# Altium PCB 激光昆虫_Main蓝牙版  - 双面板 板厚1.0mm.PcbDoc (part 1 of 2)
Units mil, origin at the board's own origin, x right, y up, seen from the top; angles counter-clockwise.
Board outline 2129 x 2216 mil, 3 copper layers (Top Layer, Mid-Layer 14, Bottom Layer); 82 components, 45 nets, 210 pads, 156 vias.
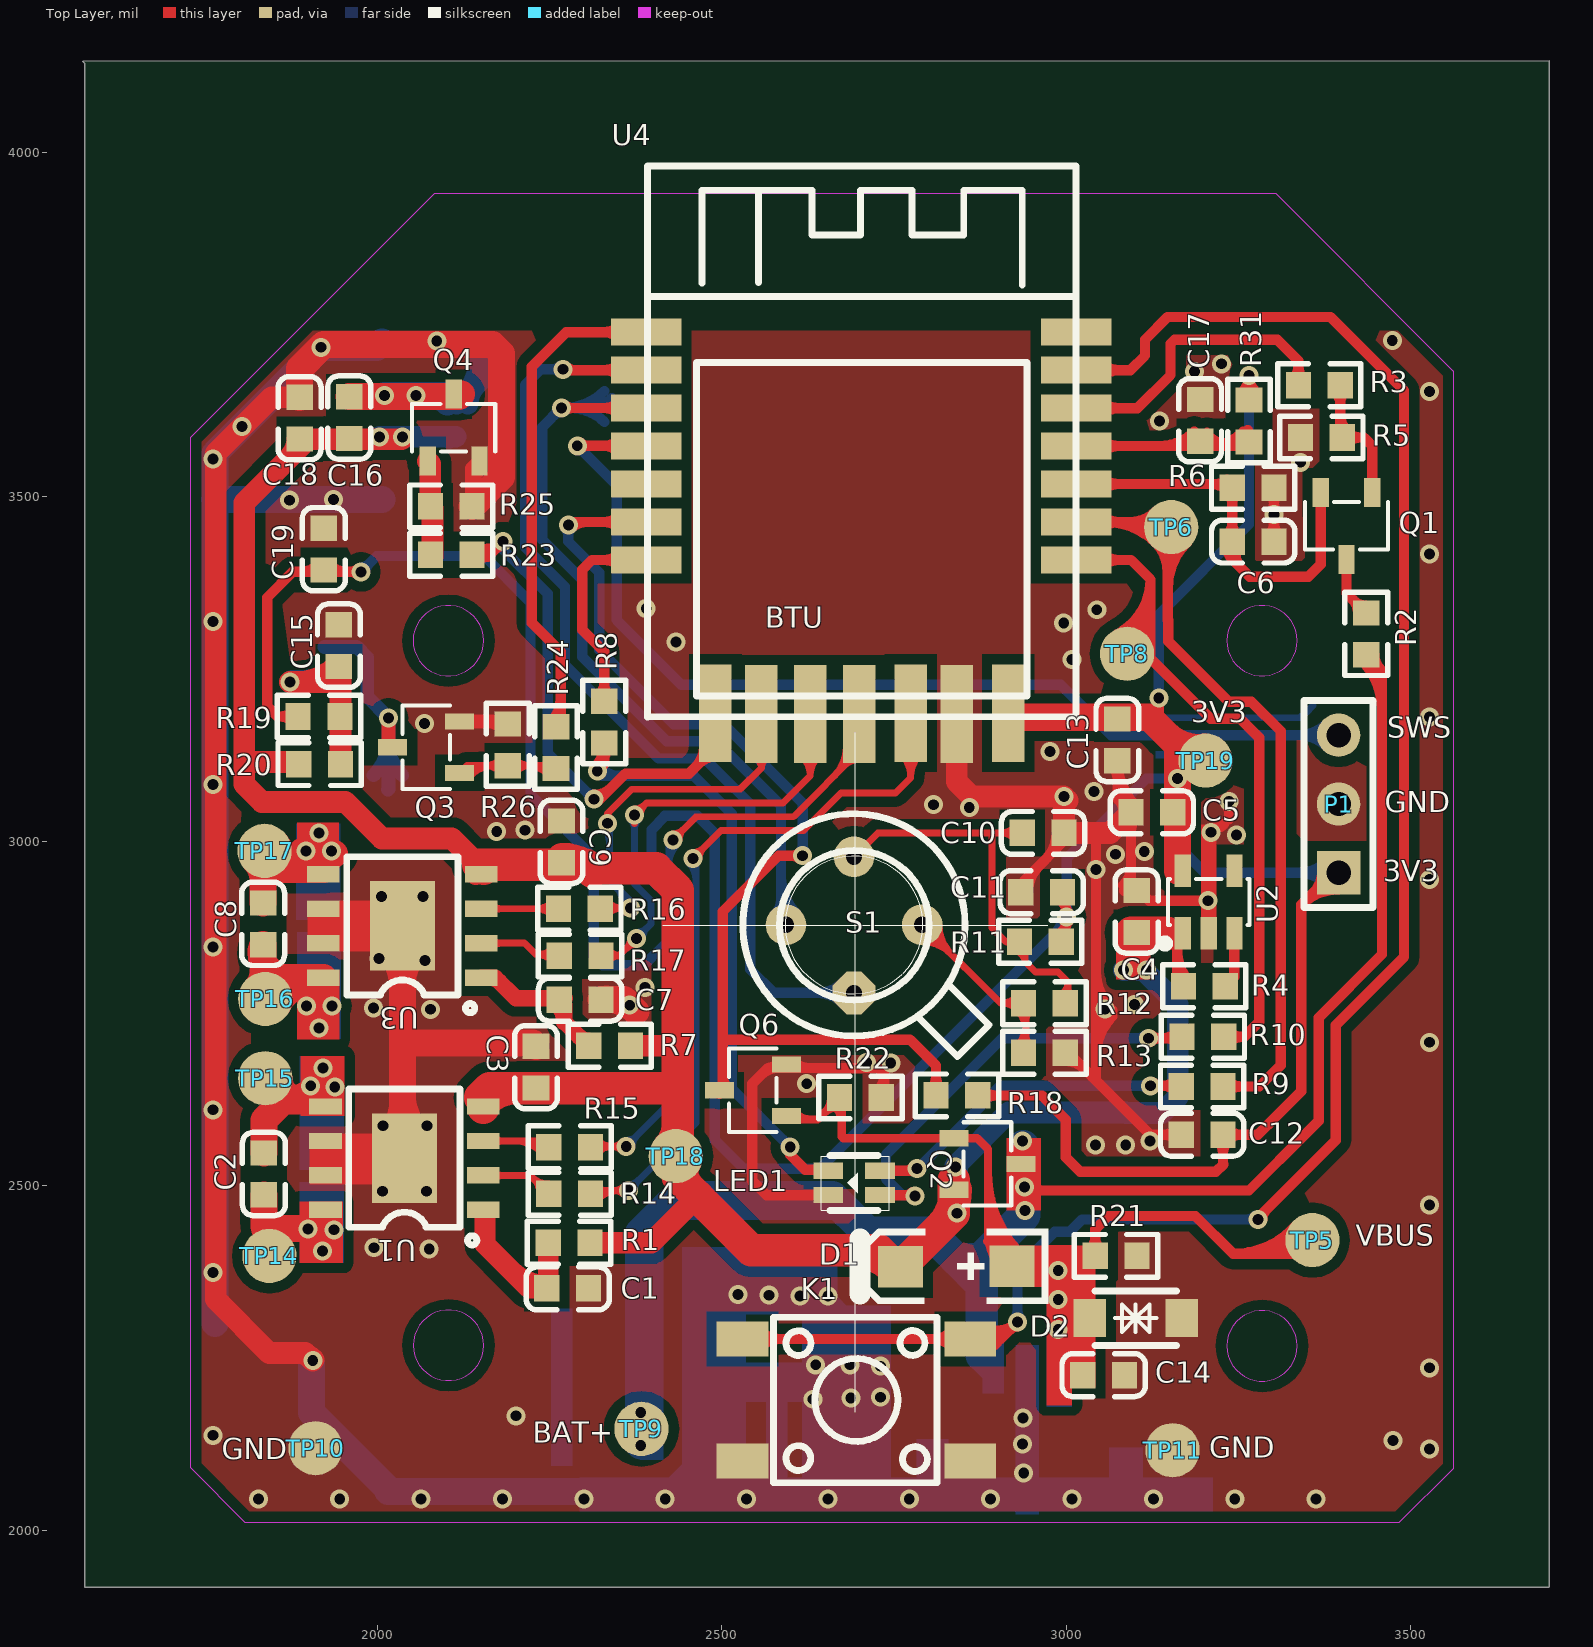
[diagram p0: Top Layer view]
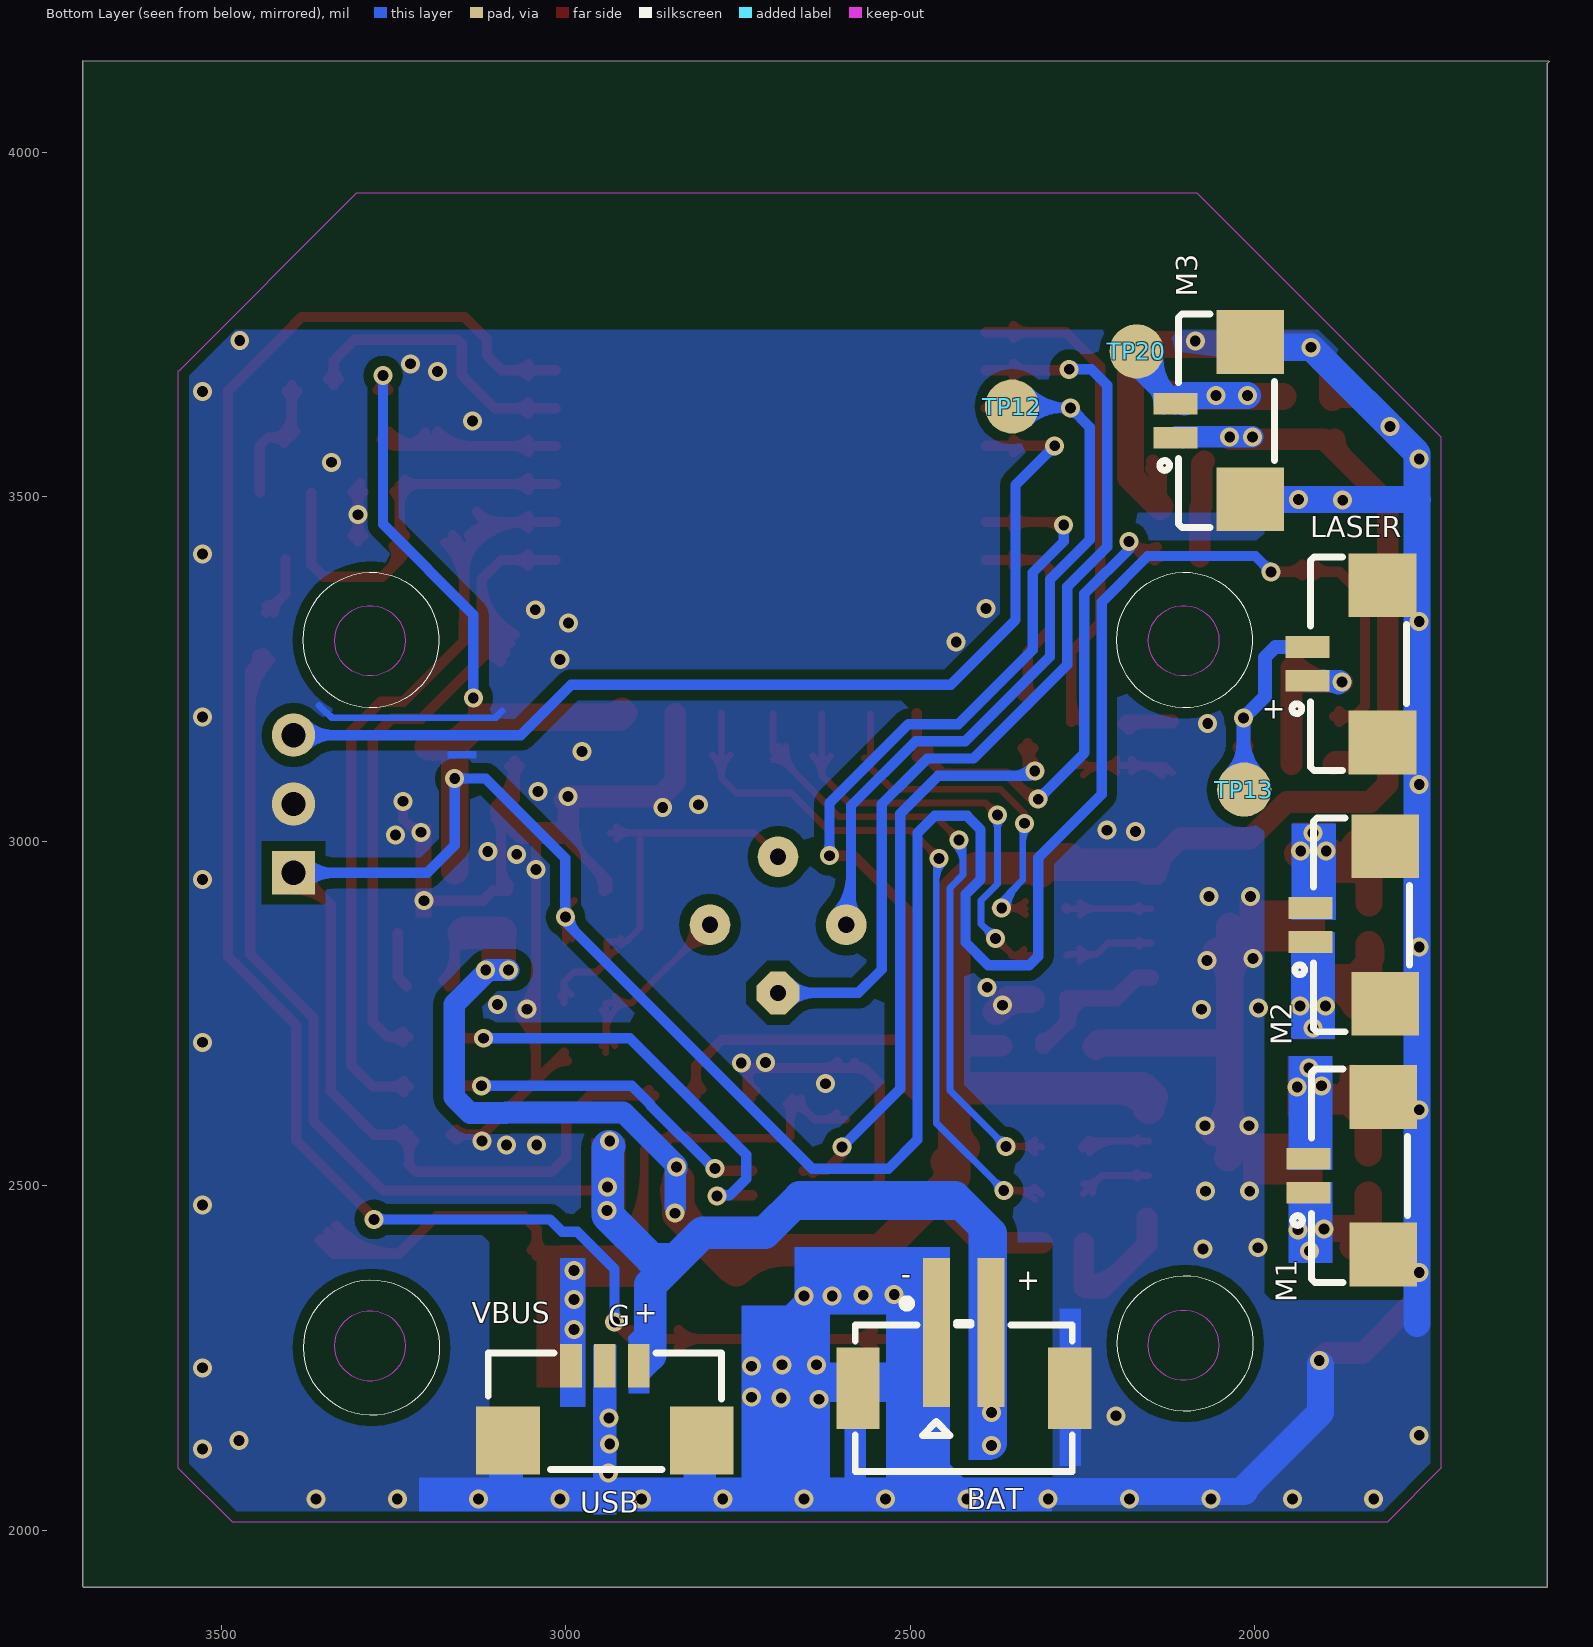
[diagram p1: Bottom Layer view, seen from below]
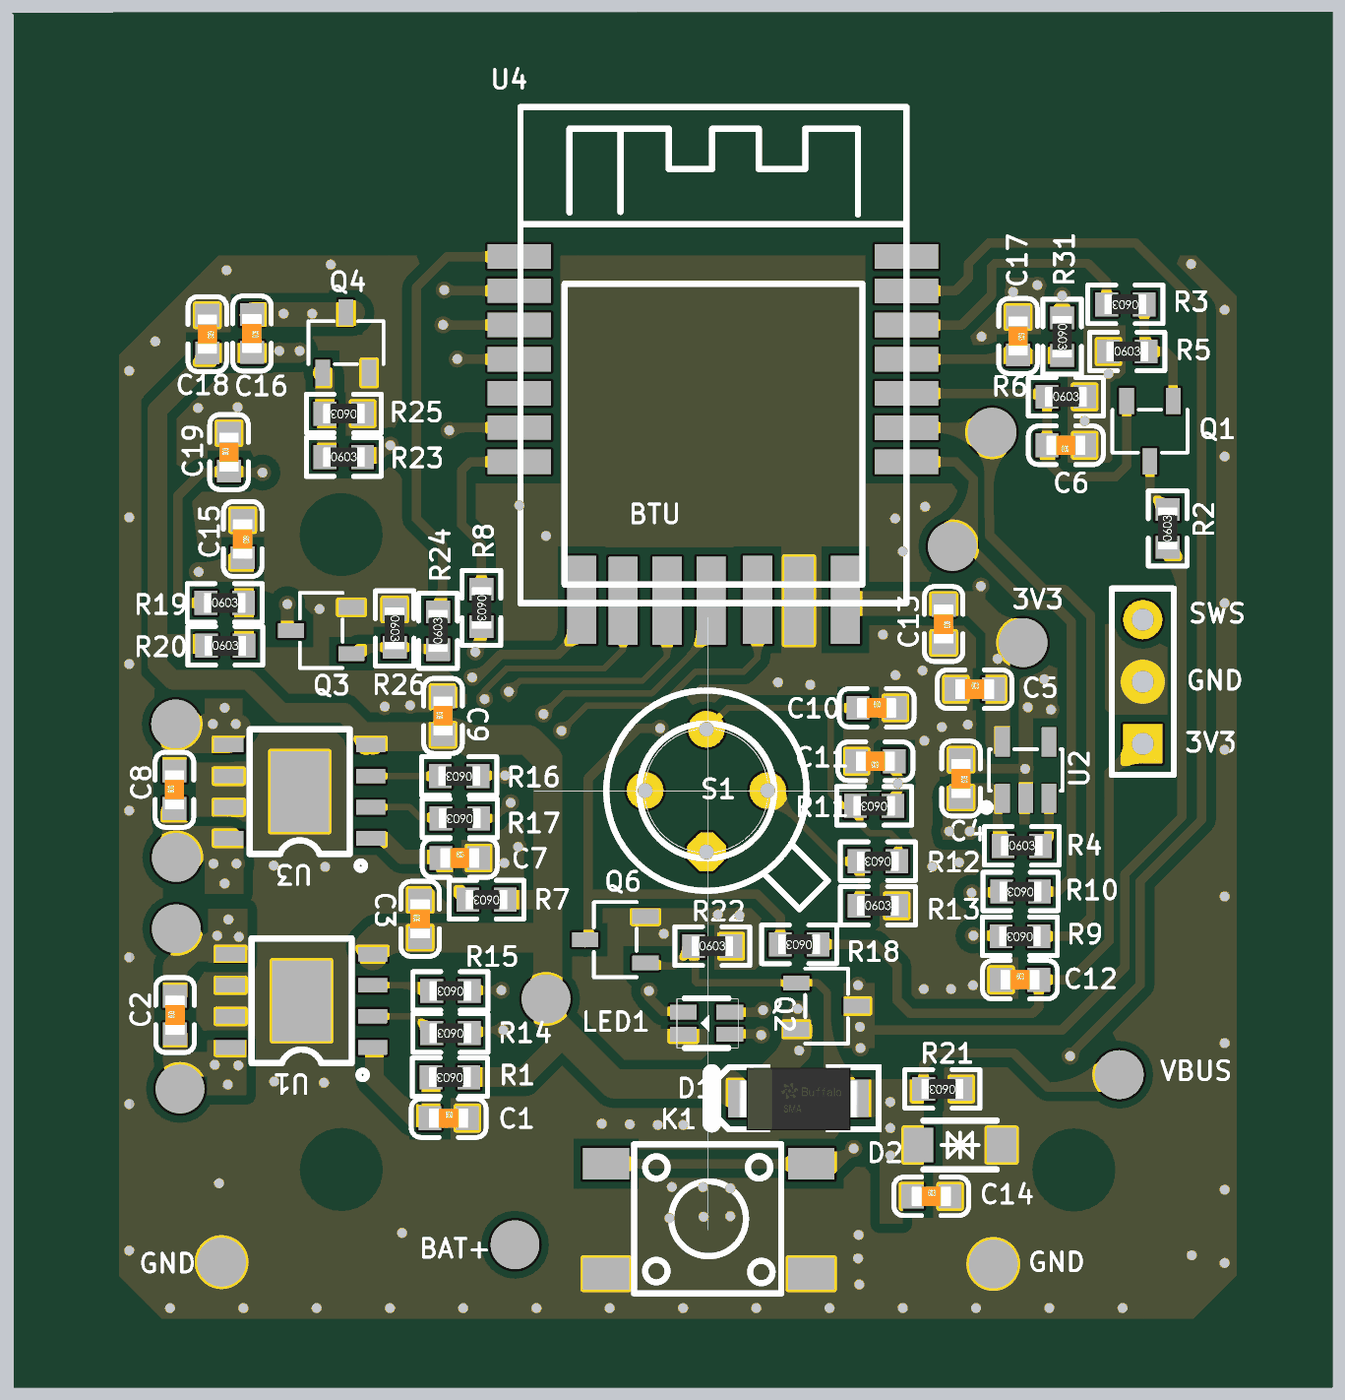
[diagram p3: 3D render of the assembled board from above, using the file's embedded part models]

## Layer stack, top to bottom
Top Solder: solder mask 0.4, Solder Resist, Dk 3.5
Top Layer: signal copper 1.4
Dielectric1: core 12.6, FR-4, Dk 4.8
Mid-Layer 14: signal copper 1.4
Dielectric2: prepreg 12.6, FR-4, Dk 4.8
Bottom Layer: signal copper 1.4
Bottom Solder: solder mask 0.4, Solder Resist, Dk 3.5

## Board outline
1572,4132 1575,4129 1575,1917 3700,1917 3701,1918 3701,4133

## Design rules (kind name [scope] priority, off if disabled: settings)
Clearance [All] p1: gap=10 ignorepadtopadclearanceinfootprint=FALSE except(0: Arc-Hole Track-Hole SMDPad-Hole THPad-Hole Via-Hole Fill-Hole Poly-Hole Region-Hole Text-Hole)
ComponentClearance [All] p1: gap=0 collisioncheckmode=3 verticalgap=0 showdistances=FALSE
FabricationTestPointUsage TestPointUsage [All] p1: valid=0 allowmultiple=FALSE
FabricationTestpoint Testpoint [All] p1: side=3 testpointundercomponent=TRUE minsize=40 maxsize=100 preferedsize=60 minholesize=0 maxholesize=40 preferedholesize=32 testpointgrid=1 allowsidetop=TRUE allowsidebottom=TRUE usegrid=TRUE gridtolerance=0.01
MinimumSolderMaskSliver [All] p1: minsoldermaskwidth=0
PlaneClearance [All] p1: clearance=10
PlaneConnect [All] p1: planeconnectstyle=Direct reliefexpansion=20 reliefentries=4 reliefconductorwidth=10 reliefairgap=10
PolygonConnect PolygonConnect_1 [IsVia] p1: connectstyle=Direct reliefconductorwidth=10 reliefentries=4 polygonreliefangle="90 Angle" airgapwidth=10
PolygonConnect [All] p2: connectstyle=Direct reliefconductorwidth=20 reliefentries=4 polygonreliefangle="90 Angle" airgapwidth=10
RoutingVias [All] p1: holewidth=28 width=50 viastyle="Through Hole" minholewidth=28 minwidth=50 maxholewidth=28 maxwidth=50
SilkToSilkClearance [All] p1: silktosilkclearance=0
SilkToSolderMaskClearance SilkscreenOverComponentPads [IsPad] p1: minsilkscreentomaskgap=0 clearancetoexposedcopper=TRUE
SolderMaskExpansion [All] p1: expansion=4
Width [All] p1: maxlimit=196.85 minlimit=10 preferedwidth=10 minimp=50.000000 maximp=50.000000 favimp=50.000000
22 further rules are at their usual default settings.

## Classes and differential pairs
component class "GKQ 1": BAT C1 C2 C3 C4 C5 C6 C7 C8 C9 C10 C11 C12 C13 C14 C15 C16 C17 C18 C19 CN2 CN3 CN4 D1 D2 D? K1 LASER LED1 M1 M3 P1 Q1 Q2 Q3 Q4 Q6 R1 R2 R3 R4 R5 R6 R7 R8 R9 R10 R11 R12 R13 R14 R15 R16 R17 R18 R19 R20 R21 R22 R23 R24 R25 R26 R31 S1 U1 U2 U3 U4 U? USB

## Components (designator, comment, footprint, x,y, rotation, side; value= is the part's Value field where it differs from the comment)
BAT "BAT" CONN-SMD_2.0-2PLT 2430,2222 r0 bottom (schematic designator CN1)
C1 "1uf/25v" 0603_C 2276,2351 r0 top
C2 "0.1uf/25v" 0603_C 1835,2517 r90 top
C3 "4.7uf/25v" 0603_C 2230,2672 r90 top
C4 "1uf" 0603_C 3102,2898 r270 top
C5 "10uF" 0603_C 3124,3042 r0 top
C6 "100nF" 0603_C 3271,3435 r180 top
C7 "1uf/25v" 0603_C 2294,2770 r0 top
C8 "0.1uf/25v" 0603_C 1834,2880 r90 top
C9 "4.7uf/25v" 0603_C 2267,2999 r90 top
C10 "0.1uf/25v" 0603_C 2966,3012 r0 top
C11 "4.7uf/25v" 0603_C 2964,2926 r180 top
C12 "10uf" 0603_c 3197,2574 r0 top
C13 "0.1uf/25v" 0603_C 3074,3147 r270 top
C14 "0.1uf/25v" 0603_C 3054,2225 r0 top
C15 "0.1uf/25v" 0603_C 1944,3284 r270 top
C16 "0.1uf/25v" 0603_C 1959,3615 r270 top
C17 "100nF" 0603_C 3194,3611 r270 top
C18 "4.7uf/25v" 0603_C 1887,3614 r270 top
C19 "4.7uf/25v" 0603_C 1922,3424 r90 top
D1 "SS54" SMA 2864,2386 r0 top
D2 "SMF6.0CA" "SOD-123 双向" 3094,2310 r180 top
K1 "KEY" KEY_SMD_4P 2693.35,2188.75 r0 top
LASER "JiGuang" SMD_HC-1.25-2PLT 1846,3297 r90 bottom (schematic designator CN6)
LED1 "tj-s1615cy6tglccsrgb-a5" LED-ARRAY-SMD_4P-L1.6-W1.5-BL-FD 2727,2484 r0 top
M1 "MOTOR1" SMD_HC-1.25-2PLT 1845,2554 r90 bottom (schematic designator CN2)
M2 "MOTOR2" SMD_HC-1.25-2PLT 1842,2918 r90 bottom (schematic designator CN3)
M3 "Motor3" SMD_HC-1.25-2PLT 2038,3650 r90 bottom (schematic designator CN5)
P1 "DEBUG" SIP3-2.54 3395,2954 r90 top
Q1 "AO3400" SOT-23 3398,3478 r90 top
Q2 "CJ3401" SOT-23 2865,2523 r180 top
Q3 "AO3400" SOT-23 2091,3145 r0 top
Q4 "AO3400" SOT-23 2119,3580 r270 top
Q6 "2N7002" SOT-23 2565,2647 r0 top
R1 "330R" 0603_R 2278,2417 r180 top
R2 "100K" 0603_R 3435,3301 r90 top
R3 "100R" 0603_R 3367,3662 r180 top
R4 "10k" 0603_R 3200.07,2789.62 r0 top
R5 "10K" 0603_R 3370,3586 r0 top
R6 "30K" 0603_R 3271,3513 r0 top
R7 "330R" 0603_R 2337,2703 r180 top
R8 "510R" 0603_R 2329,3173 r270 top
R9 "510R" 0603_R 3197,2644 r180 top
R10 "510R" 0603_R 3198,2716 r180 top
R11 "0R" 0603_R 2962,2854 r180 top
R12 "1M" 0603_R 2968,2765 r180 top
R13 "560K" 0603_R 2968,2693 r0 top
R14 "330R" 0603_R 2279,2488 r180 top
R15 "330R" 0603_R 2279,2556 r180 top
R16 "330R" 0603_R 2293,2902 r180 top
R17 "330R" 0603_R 2294,2834 r180 top
R18 "10K" 0603_R 2841,2631 r180 top
R19 "0R" 0603_R 1915,3181 r0 top
R20 "0R" 0603_R 1916,3112 r0 top
R21 "10K" 0603_R 3072,2398 r180 top
R22 "100k" 0603_R 2701,2628 r0 top
R23 "330R" 0603_R 2107,3416 r0 top
R24 "330R" 0603_R 2259,3136 r90 top
R25 "10K" 0603_R 2107,3486 r180 top
R26 "10K" 0603_R 2189,3140 r270 top
R31 "10K" 0603_R 3265,3610 r270 top
S1 "PIR-4P" PIR-D-4P 2669,2870 r315 top locked
TP5 "" TP#1 3357,2421 r0 top (schematic designator TP1)
TP6 "" TP#1 3152,3456 r0 top (schematic designator TP1)
TP8 "" TP#1 3088,3272 r0 top (schematic designator TP1)
TP9 "" TP#1 2383,2147 r0 top (schematic designator TP1)
TP10 "" TP#1 1910,2119 r0 top (schematic designator TP1)
TP11 "" TP#1 3154,2116 r0 top (schematic designator TP1)
TP12 "" TP#2 2352,3631 r0 top (schematic designator TP1)
TP13 "" TP#2 2015,3075 r0 top (schematic designator TP1)
TP14 "" TP#1 1843,2398 r0 top (schematic designator TP1)
TP15 "" TP#1 1837,2656 r0 top (schematic designator TP1)
TP16 "" TP#1 1837,2771 r0 top (schematic designator TP1)
TP17 "" TP#1 1836,2986 r0 top (schematic designator TP1)
TP18 "" TP#1 2433,2543 r0 top (schematic designator TP1)
TP19 "" TP#1 3202,3117 r0 top (schematic designator TP1)
TP20 "" TP#2 2171,3711 r0 top (schematic designator TP1)
U1 "TC618CS" ESOP-8 2039,2540 r90 top
U2 "SSP7615" SOT-23-5 3189.07,2918.62 r90 top
U3 "TC618CS" ESOP-8 2036,2877 r90 top
U4 "BTU" BTU 2388,3035 r0 top
USB "USB" SMD_HC-1.25-3PLT 2936.99,2163 r180 bottom (schematic designator CN4)

## Footprints (in the part's own frame and the unit in brackets; to place one, negate y for a bottom-side part, rotate by r counter-clockwise, add the part's x,y. Pads: shape width x height; smd on the part's side, far side on the other; paste and mask are expansions set on the pad)
0603_C [mm]
  rect 0.93x0.98 smd: 1(-0.77,0) 2(0.77,0)
  silkscreen extent -1.54,-0.79 1.54,0.79, body extent -0.8,-0.4 0.8,0.4, height 0.3
0603_c [mm]
  rect 0.93x0.98 smd: 1(-0.77,0) 2(0.77,0)
  silkscreen extent -1.54,-0.79 1.54,0.79, body extent -0.8,-0.4 0.8,0.4, height 0.3
0603_R [mm]
  rect 0.93x0.98 smd: 1(-0.77,0) 2(0.77,0)
  silkscreen extent -1.53,-0.79 1.54,0.79, body extent -0.85,-0.4 0.85,0.4, height 0.56
BTU [mm]
  rect 2.6x1 smd paste+0 mask+0.102: 1(0.051,17.882) 2(0.051,16.482) 3(0.051,15.082) 4(0.049,13.68) 5(0.051,12.282) 6(0.051,10.882) 7(0.051,9.482) 15(15.9,9.48) 16(15.9,10.88) 17(15.9,12.28) 18(15.9,13.68) 19(15.9,15.08) 20(15.9,16.48) 21(15.9,17.88)
  rect 1.2x3.6 smd paste+0 mask+0.102: 8(2.602,3.834) 9(4.3,3.8) 10(6.1,3.8) 11(7.9,3.8) 12(9.802,3.834) 13(11.5,3.8) 14(13.402,3.834)
  silkscreen extent 0.1,3.68 15.9,24
CONN-SMD_2.0-2PLT [mm]
  rect 1x5.5 smd: 1(0.798,-1.644) 2(-1.202,-1.644)
  rect 1.6x3 smd: 3(3.698,0.406) 4(-4.102,0.406)
  silkscreen extent -4.2,-2.87 3.8,3.48
ESOP-8 [mm]
  rect 0.6x1.2 smd: 1(-1.905,-2.908) 2(-0.635,-2.908) 3(0.635,-2.908) 4(1.905,-2.908) 5(1.905,2.908) 6(0.635,2.908) 7(-0.635,2.908) 8(-1.905,2.908)
  rect 3.3x2.4 smd: 9(0,0)
  silkscreen extent -3.2,-2.67 2.55,2.05
KEY_SMD_4P [mm]
  rect 1.9x1.3 smd: 1(-4.155,2.252) 2(4.244,2.252) 3(-4.155,-2.247) 4(4.244,-2.247)
  silkscreen extent -3.01,-3.05 3.02,3.05
LED-ARRAY-SMD_4P-L1.6-W1.5-BL-FD [mil]
  rect 43.3x23.6 smd: 1(-72.67,2.3) 2(2.13,2.3) 3(2.13,37.7) 4(-72.67,37.7)
  silkscreen extent -70,-20 0,60
PIR-D-4P [mm]
  oct 1.5x1.5 hole 0.6: 1(2.026,-1.213)
  round 1.5 hole 0.6: 2(2.026,2.337) 3(-1.524,2.337) 4(-1.524,-1.213)
  silkscreen extent -3.84,-3.54 6.38,4.66
SIP3-2.54 [mm]
  rect 1.6x1.6 hole 0.9: 1(0,0)
  round 1.6 hole 0.9: 2(2.54,0) 3(5.08,0)
  silkscreen extent -1.27,-1.27 6.35,1.27
SMA [mm]
  rect 1.65x1.53 smd: 1(1.449,-0.076) 2(-2.665,-0.102)
  silkscreen extent -4.16,-1.47 2.8,1.32, body extent -3.06,-1.39 1.84,1.18, height 2.39
SMD_HC-1.25-2PLT [mm]
  rect 0.8x1.62 smd paste+0 mask+0.05: 1(-1.63,1.953) 2(-0.38,1.953)
  rect 2.35x2.5 smd paste+0 mask+0.05: 3(1.895,-0.807) 4(-3.905,-0.807)
  silkscreen extent -4.94,-1.7 2.93,2.53
SMD_HC-1.25-3PLT [mm]
  rect 0.8x1.6 smd paste+0 mask+0.05: 1(-1.402,1.927) 2(-0.152,1.927) 3(1.098,1.927)
  rect 2.35x2.5 smd paste+0 mask+0.05: 4(-3.727,-0.833) 5(3.423,-0.833)
  silkscreen extent -4.45,-1.9 4.15,2.4
"SOD-123 双向" [mm]
  rect 1.2x1.4 smd: 1(-1.864,0.06) 2(1.536,0.06)
  silkscreen extent -1.66,-0.94 1.34,1.06
SOT-23 [mm]
  rect 1.07x0.6 smd: 1(0.719,-1.166) 2(0.719,0.734) 3(-1.751,-0.216)
  silkscreen extent -1.39,-1.75 0.36,1.32
SOT-23-5 [mm]
  rect 1.2x0.6 smd paste+0 mask+0.05: 1(-1.325,0.51) 2(-1.325,-0.44) 3(-1.325,-1.39) 4(0.975,-1.39) 5(0.975,0.51)
  silkscreen extent -1.85,-1.94 0.67,1.32
TP#1 [mm]
  round 2 smd: 1(0,0)
TP#2 [mm]
  round 2 smd far side: 1(0,0)

## Part data
BAT LASER M1 M2 M3: library part HC-1.25-2PLT
C1 C2 C3 C4 C5 C6 C7 C8 C9 C10 C11 C13 C14 C15 C16 C18 C19: library part Cap, "Capacitor"
C12: library part C-0603, "C-?-K-0603"
C17: library part CAP
D1: library part "Diode 1N4148", "High Conductance Fast Diode"
D2: library part SMF5.0CA_C726939
K1: library part TS-1002S-05026C
P1: library part "Header 4", "Header, 4-Pin"
Q1 Q3 Q4 Q6: library part JMTL3400A
R1 R2 R3 R4 R5 R6 R7 R8 R9 R10 R11 R12 R13 R18 R19 R20 R22 R25 R26 R31: library part RES
R14 R15 R16 R17 R21 R23 R24: library part Res2, "Resistor"
TP5 TP6 TP8 TP9 TP10 TP11 TP12 TP13 TP14 TP15 TP16 TP17 TP18 TP19 TP20: library part "T POINT R"
U2: library part SSP7615-33M5R
USB: library part HC-1.25-3PLT

## Via types
v1: diameter 27.56, hole 15.75, Top Layer to Bottom Layer, tented both sides, 156 vias

## Nets (pads, with @x,y where several pads share a name; then routed paths per layer and width w, separated by ;. In a path a pad name is that pad's centre, name@x,y a point inside that pad or via, vN(x,y) a via of type N, cw(c..) or ccw(c..) an arc to the next point about the centre after c; other vN are vias at no path point)
3V3: C5.2 C11.1 C12.2 C13.1 C19.1 P1.1 R11.1 R18.1 R19.1 R31.1 TP19.1 U2.5 U4.14 | length 6338.9
  Top Layer w10: R11.1@2986.2,2866.8 ccw(c2974.2,2890) v1(3000.31,2890) ; C11.1@2987.08,2913.85 cw(c2971.28,2889.49) v1@3000.31,2889.49 ; R11.1@2990.79,2857.92 ccw(c2982.7,2873.57) 3000.31,2873.57 ; v1@2994.11,2883.79 cw(c2979.12,2868.8) 3000.31,2868.8 cw(c3021.51,2868.8) v1@3006.52,2883.79 ; v1@2994.11,2896.21 ccw(c2979.12,2911.2) 3000.31,2911.2 ccw(c3021.51,2911.2) v1@3006.52,2896.21 ; R11.1@3000.31,2854 v1(3000.31,2890) ; C11.1@3000.31,2907.37 cw(c3011.96,2907.37) C11.1@3003.73,2915.61 ; C11.1@3000.31,2926 v1(3000.31,2890)
  Top Layer w15: R19.1@1877.04,3173.36 ccw(c1858.6,3154.91) 1858.6,3181 ccw(c1858.6,3207.09) R19.1@1877.04,3188.64 ; R19.1@1884.69,3181 1855,3181 1839.75,3196.25 1839.75,3353.75 1877,3391 v1(1976,3391) ; 1888.45,3391 ccw(c1888.45,3426.25) C19.1@1913.37,3401.33 ; 1901.4,3391 cw(c1901.4,3374.07) C19.1@1913.37,3386.04 ; C19.1@1930.63,3386.04 cw(c1942.6,3374.07) 1942.6,3391 ; C19.1@1930.63,3401.33 ccw(c1955.55,3426.25) 1955.55,3391 ; v1@1971.56,3386.56 ccw(c1960.84,3375.84) 1960.84,3391 ccw(c1960.84,3406.16) v1@1971.56,3395.44 ; R18.1@2871.31,2631 2964,2631 2999,2596 2999,2541 3020,2520 3217,2520 3228,2531 3227.31,2531.69 C12.2@3227.31,2574 3278,2574 3299,2595 ; R18.1@2878.96,2623.36 cw(c2897.4,2604.91) 2897.4,2631 cw(c2897.4,2657.09) R18.1@2878.96,2638.64 ; 3134,3166 v1@3134,3195 ; C12.2@3219.67,2565.37 cw(c3201.22,2546.93) 3227.31,2546.93 cw(c3253.4,2546.93) C12.2@3234.96,2565.37 ; C12.2@3234.96,2566.36 cw(c3253.4,2547.91) 3253.4,2574 cw(c3253.4,2600.09) C12.2@3234.96,2581.64 ; R31.1@3257.36,3654.96 ccw(c3238.91,3673.4) v1@3265,3673.4 ; R31.1@3265,3647.31 v1@3265,3673.4 ; R31.1@3272.64,3654.96 cw(c3291.09,3673.4) v1@3265,3673.4 ; 3292,2588 3299,2595 ; 3340.38,2907.38 cw(c3395,2852.76) P1.1@3395,2930 ; 3359.69,2926.69 ccw(c3332.39,2954) P1.1@3371,2954 ; P1.1@3365.99,2932.99 cw(c3395,2903.97) P1.1@3395,2945 ; P1.1@3387,2954 3341,2908 3341,2637 3299,2595
  Top Layer w39.37: U4.14@2915.62,3185.94 2921.56,3180 3120,3180 3134,3166 3161,3139 v1(3161,3091) U2.5@3161,2957 ; U4.14@2918.41,3188.72 ccw(c2939.46,3209.77) 2939.46,3180 ; 3143.5,3156.5 ccw(c3192.55,3205.54) TP19.1@3199.91,3136.57
  Bottom Layer w15: v1(1976,3391) 1999,3414 2099,3414 ; v1@1976,3397.28 ccw(c1976,3412.44) 1986.72,3401.72 ccw(c1997.44,3391) v1@1982.28,3391 ; 2116,3414 2099,3414 ; 2984.7,2867.46 ccw(c2962.16,2890) v1@2994.03,2890 ; v1@2995.87,2894.44 ccw(c2985.15,2905.16) 3000.31,2905.16 ccw(c3015.47,2905.16) v1@3004.75,2894.44 ; v1(3134,3208) 3134,3329 3265,3460 v1(3265,3676) ; v1@3156.56,3095.44 cw(c3145.84,3106.16) 3145.84,3091 cw(c3145.84,3075.84) 3156.56,3086.56 cw(c3145.84,3075.84) 3161,3075.84 cw(c3176.16,3075.84) v1@3165.44,3086.56 ; P1.1@3378.03,2937.03 ccw(c3337.07,2896.07) 3337.07,2954 ccw(c3337.07,3011.93) P1.1@3378.03,2970.97 ; P1.1@3395,2954 3201,2954 3161,2994 v1(3161,3091) 3116,3091 3000.31,2975.31 v1(3000.31,2890) 3000.31,2883.08 2641.96,2524.72 2531.28,2524.72 2489.28,2566.72 2489.28,3011.72 2464,3037 2417,3037 2417,3036 2397.72,3016.72 2397.72,2944.8 2419.5,2923.02 2419.5,2853 2386.5,2820 2327,2820 2314,2833 2314,2976 2222,3068 2222,3347 2155,3414 2099,3414
AD_BAT: C6.2 Q1.2 R6.1 U4.17 | length 886.7
  Top Layer w15: U4.17@3013.98,3518.46 R6.1@3232,3518.46 ; U4.17@3054.1,3509.85 cw(c3074.9,3489.05) 3074.9,3518.46 cw(c3074.9,3547.88) U4.17@3054.1,3527.08 ; 3211.02,3518.46 cw(c3211.02,3487.32) R6.1@3233.04,3509.34 ; 3218.17,3518.46 ccw(c3218.17,3539.5) R6.1@3233.04,3524.63 ; C6.2@3233.04,3443.63 ccw(c3214.6,3462.07) 3240.69,3462.07 ccw(c3266.78,3462.07) C6.2@3248.33,3443.63 ; R6.1@3233.04,3507.37 cw(c3214.6,3488.93) 3240.69,3488.93 cw(c3266.78,3488.93) R6.1@3248.33,3507.37 ; C6.2@3237.11,3436.21 ccw(c3255.4,3424.96) 3240.22,3409.78 ; R6.1@3238.22,3518.46 3240.69,3516 C6.2@3240.69,3435 3240.69,3409.31 ; C6.2@3249.89,3428.35 ccw(c3272.03,3414.73) 3253.65,3396.35 ; Q1.2@3369.12,3506.31 3369.12,3402.12 3351,3384 3266,3384 3240.69,3409.31 ; 3240.69,3409.32 cw(c3263.51,3409.32) 3248.02,3426.08 ccw(c3263.51,3409.32) 3240.69,3409.32 ; 3240.69,3409.32 ccw(c3217.86,3409.32) 3233.35,3426.08 cw(c3217.86,3409.32) 3240.69,3409.32
AD_BAT_CON: R3.2 U4.19 | length 525.6
  Top Layer w15: U4.19@3013.98,3628.7 3103.06,3628.7 3151,3676.64 3151,3722 3157,3728 3306,3728 3336.68,3697.32 R3.2@3336.68,3662 ; U4.19@3054.1,3620.08 cw(c3074.9,3599.28) 3074.9,3628.7 cw(c3074.9,3658.12) U4.19@3054.1,3637.32 ; R3.2@3329.04,3670.63 ccw(c3310.59,3689.07) 3336.68,3689.07 ccw(c3362.77,3689.07) R3.2@3344.33,3670.63
BAT+: BAT.2 Q2.3 R2.1 TP9.1 USB.3 | length 2679.9
  Top Layer w15: v1@2936,2569 v1@2942,2563 ; v1@2943.44,2502.44 ccw(c2966.23,2525.23) 2966.23,2493 ; v1@2944.65,2500.74 ccw(c2957,2506.72) 2957,2493 3265,2493 3351,2579 ; 3335,2563 3351,2579 ; R2.1@3428.34,3263.04 cw(c3356.74,3191.44) 3458,3191.44 ; R2.1@3435,3270.69 3458,3247.69 3458,2836 3366,2744 3366,2594 3351,2579 ; R2.1@3435.98,3259.88 cw(c3435.98,3236.16) R2.1@3452.75,3252.93 ; R2.1@3438.95,3273.65 cw(c3392.96,3227.66) 3458,3227.66 ; R2.1@3446.79,3270.69 ccw(c3475.26,3270.69) 3455.13,3250.56
  Bottom Layer w15: 2864,2245 USB.3@2885,2224 ; 2881,2299 2902,2278
  Bottom Layer w47.24: v1@2382.67,2126 2382.67,2430.67 2435,2483 2660,2483 2711,2432 2801,2432 2839.5,2393.5 ; 2877,2254 2877,2356 2839.5,2393.5 ; v1@2937,2557 2939,2555 v1(2939,2498) 2939,2457 2875.5,2393.5 2839.5,2393.5
  other v1: 2382,2123 2382,2171 2940,2464 2936,2565
GND: BAT.1 BAT.3 BAT.4 C1.2 C3.2 C4.1 C5.1 C6.1 C7.2 C9.2 C10.2 C11.2 C12.1 C13.2 C14.2 C15.1 C17.1 C18.1 C19.2 D2.1 K1.3 K1.4 LASER.3 LASER.4 LED1.1 M1.3 M1.4 M2.3 M2.4 M3.3 M3.4 P1.2 Q3.2 Q4.2 Q6.2 R5.1 R6.2 R13.2 R21.1 R22.2 R25.1 R26.1 TP10.1 TP11.1 U1.6 U1.7 U1.9 U2.2 U3.6 U3.7 U3.9 U4.13 USB.2 USB.4 USB.5 | length 9681.5
  Top Layer w15: 2555.92,2659.92 cw(c2584.05,2631.78) Q6.2@2584.05,2671.57 ; 2560.8,2664.8 cw(c2578.46,2647.14) Q6.2@2583.23,2671.65 ; Q6.2@2580.44,2678.23 cw(c2566.88,2687.06) 2566.88,2670.88 ; Q6.2@2605.61,2678.93 ccw(c2625.04,2698.36) 2625.04,2670.88 ; LED1.1@2654.33,2486.3 2564.7,2486.3 2544,2507 2544,2648 2566.88,2670.88 ; R22.2@2724.61,2637.46 ccw(c2705.98,2661) 2736,2661 ; R22.2@2731.32,2628 2736,2632.68 2736,2661 ; C11.2@2939.69,2930 2939.69,2943.65 2999.31,3003.28 C10.2@2999.31,3005 ; C11.2@2944.49,2926.98 cw(c2996.34,2926.98) 2959.68,2963.65 ; 2970.28,2974.24 ccw(c2933.5,3011.02) C10.2@2985.51,3011.02 ; R13.2@2998.32,2681.21 cw(c2998.32,2643.09) 3025.27,2670.04 ; R13.2@3002.32,2693 3043.16,2652.16 3121.32,2574 C12.1@3166.68,2574 ; 3043,2656 3043,3012 ; 3043,2688.97 cw(c3123.03,2688.97) 3066.44,2745.56 ; 3043,2725.18 cw(c3086.82,2725.18) v1(3055.83,2756.17) ; 3043,2774.82 ccw(c3086.82,2774.82) v1@3055.83,2743.83 ; 3043,2811.03 ccw(c3123.03,2811.03) v1@3066.44,2754.44 ; C13.2@3066.36,3109.04 cw(c3047.91,3090.6) 3074,3090.6 cw(c3100.09,3090.6) C13.2@3081.64,3109.04 ; 3074,3080.38 ccw(c3131.08,3080.38) C5.1@3090.72,3040.02 ; C13.2@3074,3116.6 ccw(c3167.3,3116.6) C5.1@3101.33,3050.63 ; C13.2@3074,3116.69 3074,3061.68 C5.1@3093.68,3042 3093.68,2937.55 3084.07,2927.94 3105.75,2927.94 3120.07,2913.62 v1@3198.4,2913.62 ; 3074.49,3061.19 ccw(c3092.41,3079.11) C5.1@3093.3,3053.78 ; C5.1@3075.93,3059.75 cw(c3059.16,3042.98) C5.1@3082.88,3042.98 ; 3082.34,2935.96 ccw(c3054.96,2963.34) 3093.68,2963.34 ; C5.1@3086.04,3033.37 cw(c3067.59,3014.93) 3093.68,3014.93 cw(c3119.77,3014.93) C5.1@3101.33,3033.37 ; C12.1@3159.04,2566.36 ccw(c3140.59,2547.91) 3140.59,2574 ccw(c3140.59,2600.09) C12.1@3159.04,2581.64 ; v1@3204.57,3000.57 ccw(c3192.15,3013) v1(3209.72,3013) ; v1@3216,3019.28 ccw(c3216,3036.85) 3228.43,3024.43 ; v1@3231.56,3053.56 cw(c3220.84,3042.84) 3236,3042.84 cw(c3251.16,3042.84) v1@3240.44,3053.56 ; 3236,3032 v1(3236,3058) ; C6.1@3293.67,3443.63 ccw(c3275.23,3462.07) 3301.32,3462.07 ccw(c3327.41,3462.07) C6.1@3308.96,3443.63 ; R6.2@3293.67,3507.37 cw(c3275.23,3488.93) 3301.32,3488.93 cw(c3327.41,3488.93) R6.2@3308.96,3507.37 ; v1@3296.88,3469.56 cw(c3286.16,3458.84) 3301.32,3458.84 cw(c3316.48,3458.84) v1@3305.76,3469.56 ; v1@3296.88,3478.44 ccw(c3286.16,3489.16) 3301.32,3489.16 ccw(c3316.48,3489.16) v1@3305.76,3478.44 ; R6.2@3297.69,3519.63 3301.32,3516 C6.1@3301.32,3435 ; 2566.88,2670.88 2593.31,2670.88 2726.12,2670.88 2736,2661
  Top Layer w20: Q3.2@2119.31,3173.88 2185.43,3173.88 R26.1@2189,3170.31 ; R25.1@2131.44,3492.86 ccw(c2117.26,3507.04) 2137.31,3507.04 ccw(c2157.37,3507.04) R25.1@2143.19,3492.86 ; R25.1@2137.31,3486 2137.31,3541.12 Q4.2@2147.88,3551.69 ; 2137.31,3512.56 cw(c2177.77,3512.56) Q4.2@2149.16,3541.16 ; 2159.35,3173.88 cw(c2159.35,3141.64) R26.1@2182.14,3164.44
  Top Layer w31.5: 1765.01,3273 1765.01,3476 ; 1884.2,2257 cw(c1884.2,2224.2) v1@1907.39,2247.39 ; C18.1@1887,3644.32 1846.32,3644.32 1765.01,3563.01 1765.01,3476 ; v1(1906,2246) 1895,2257 1843,2257 1765.01,2334.99 1765.01,3476 ; U4.13@2840.76,3184.61 2840.76,3086.24 2864,3063 2866,3065 2996,3065 v1(2996.31,3064.69) ; v1@3002,3059 v1(2996.31,3064.69) ; C5.1@3093.68,3042 3063.68,3012 3047,3012 C10.2@2996.31,3012 v1(2996.31,3064.69)
  Top Layer w39.37: C18.1@1887,3644.32 1887,3686 v1(1918,3717) 1922,3721 2167,3721 2180,3708 2180,3528.69 R25.1@2137.31,3486 ; U3.9@2016.51,2839.8 cw(c1969.47,2792.75) 2036,2792.75 cw(c2102.53,2792.75) U3.9@2055.49,2839.8 ; U1.9@2019.51,2577.2 ccw(c1979.71,2617.01) 2036,2617.01 ; 2036,2631.49 ccw(c2112.78,2631.49) U1.9@2058.49,2577.2 ; U3.9@2036,2877 2036,2707 ; U1.9@2039,2540 2036,2543 2036,2707 ; C3.2@2230,2702.31 2225.31,2707 2036,2707 ; C7.2@2324.15,2770.38 cw(c2331.5,2708.84) v1@2375.33,2752.67 ; C7.2@2324.31,2770 2358,2770 v1(2366,2762)
  Bottom Layer w10: 3092,3189 3101.78,3179.22 3339.19,3179.22 3347.07,3187.11 3348.11,3187.11 3358,3197
  Bottom Layer w15: v1@2659,2337 2680,2316 ; v1@2931.56,2120.56 cw(c2918.45,2107.45) 2936.99,2107.45 ; v1@2931.56,2129.44 ccw(c2918.45,2142.55) 2936.99,2142.55 ; v1@2932.56,2158.56 cw(c2921.84,2147.84) 2937,2147.84 cw(c2952.16,2147.84) v1@2941.44,2158.56 ; v1@2932.56,2167.44 ccw(c2921.84,2178.16) 2937,2178.16 ccw(c2952.16,2178.16) v1@2941.44,2167.44 ; v1@2936.99,2081.01 USB.2@2936.99,2221.87 ; 2936.99,2100.6 ccw(c2955.6,2100.6) v1@2942.44,2087.44 ; 2936.99,2188.75 cw(c2977.35,2188.75) USB.2@2948.81,2217.29
  Bottom Layer w39.37: 1763.74,3496.26 M3.4@2006.21,3496.26 ; 1764,2300 1764,3500 1764,3563 v1(1918,3717) 1998.61,3717 M3.3@2006.21,3724.6 ; v1@1904,2240 1904,2171 2015,2060 ; 2015,2056 2430,2056 ; 2432,2058 2463.41,2089.41 ; 2461.41,2091.41 BAT.1@2461.41,2286.73
  other v1: 1827,2045 1945.11,2045 2063.22,2045 2181.33,2045 2299.44,2045 2417.55,2045 2535.66,2045 2653.77,2045 2771.88,2045 2889.99,2045 3008.1,2045 3126.21,2045 3244.32,2045 3362.43,2045 2938,2083 3527,2117.57 2936,2125 3474,2130 1761,2137.68 2937,2163 2201,2166 2632,2190 2687,2192 2730,2193 3527,2235.68 2730,2238 2636,2240 2686,2240 2613,2340 2654,2340 2568,2341 2523,2342 1761,2373.9 2075,2408 1995,2410 3527,2471.9 2007,2492 2071,2492 3042,2559 3086,2559 3121.32,2565 2008,2587 2072,2587 1761,2610.12 2623,2648 2745,2678 2710,2679 3527,2708.12 2077,2756 1994,2758 3099,2763 2388,2788 2069,2827 2002,2830 1761,2846.34 3205.4,2913.62 2006,2920 2066,2920 3527,2944.34 3043,2959 3071,2981 3113,2985 3247,3009 2173,3014 2214,3016 2859,3049 2807,3053 3040,3072 1761,3082.56 2976,3130 2068,3171 3527,3180.56 3008,3264 2433,3289 2996,3317 1761,3318.78 3044,3336 2390,3338 3527,3416.78 3301.32,3474 1872,3495 1936,3496.26 3339.69,3550 1761,3555 1803.2,3602.2 3135,3610 3527,3653 3186,3682 3225,3693 2086,3726 3473,3727
JIGUANG: R24.2 U4.1 | length 802.6
  Top Layer w15: R24.2@2252.34,3173.96 ccw(c2219.37,3206.93) 2266,3206.93 ; R24.2@2266,3173.32 2266,3275 2224,3317 2224,3689 2274,3739 U4.1@2390,3739 ; U4.1@2349.89,3730.38 ccw(c2329.09,3709.58) 2329.09,3739 ccw(c2329.09,3768.42) U4.1@2349.89,3747.62
KEY: K1.1 K1.2 U4.20 | length 3231.1
  Top Layer w15: K1.1@2529.75,2277.43 K1.2@2860.45,2277.43 2904.43,2277.43 v1(2929,2302) cw(c2898.73,2332.27) K1.2@2880.12,2293.72 ; K1.1@2554.35,2264.63 cw(c2585.23,2233.75) 2585.23,2277.43 cw(c2585.23,2321.1) K1.1@2554.35,2290.22 ; K1.2@2835.85,2264.63 ccw(c2804.96,2233.75) 2804.96,2277.43 ccw(c2804.96,2321.1) K1.2@2835.85,2290.22 ; K1.2@2867.08,2266.7 ccw(c2879.28,2291.98) 2899.13,2272.13 ; K1.2@2873.6,2280.21 ccw(c2889.01,2312.12) 2914.06,2287.06 ; K1.2@2887.72,2268.03 cw(c2904.42,2257.88) 2904.42,2277.43 cw(c2904.42,2296.98) K1.2@2887.72,2286.82 ; v1@2922.72,2302 cw(c2907.56,2302) 2918.28,2291.28 cw(c2929,2280.56) v1@2929,2295.72 ; U4.20@3013.98,3683.82 3092.82,3683.82 3114,3705 3114,3728 3147,3761 3383,3761 3408,3736 ; U4.20@3054.1,3675.2 cw(c3074.9,3654.4) 3074.9,3683.82 cw(c3074.9,3713.24) U4.20@3054.1,3692.44 ; v1@3277,2452 3391,2566 3391,2733 3490,2832 3490,3654 3408,3736 ; v1@3284.28,2451 cw(c3304.27,2451) 3290.13,2465.13 ; 3456,3688 3408,3736
  Bottom Layer w15: v1@2924.56,2306.44 ccw(c2913.84,2317.16) 2929,2317.16 ccw(c2944.16,2317.16) v1@2933.44,2306.44 ; v1(2929,2302) 2929,2379 2983,2433 3005,2433 3023,2451 v1(3278,2451) ; v1@3273.56,2446.56 ccw(c3262.84,2435.84) 3262.84,2451 ccw(c3262.84,2466.16) v1@3273.56,2455.44
LED_B: R10.1 TP8.1 U4.15 | length 1339.6
  Top Layer w15: U4.15@3013.98,3408.23 3093.77,3408.23 3122,3380 ; U4.15@3054.1,3399.61 cw(c3074.9,3378.81) 3074.9,3408.23 cw(c3074.9,3437.65) U4.15@3054.1,3416.84 ; TP8.1@3073.41,3300.34 ccw(c3032.41,3380) 3122,3380 ; TP8.1@3080.28,3287 ccw(c3045.07,3355.4) 3122,3355.4 ; TP8.1@3087.14,3273.66 ccw(c3057.73,3330.81) 3122,3330.81 ; TP8.1@3088,3272 3115,3272 3209.44,3177.56 3252.44,3177.56 3280,3150 3280,2738 3258,2716 R10.1@3228.31,2716 ; TP8.1@3094.01,3260.33 ccw(c3070.39,3306.22) 3122,3306.22 ; TP8.1@3122,3272 3122,3380 ; R10.1@3235.96,2708.36 cw(c3254.4,2689.91) 3254.4,2716 cw(c3254.4,2742.09) R10.1@3235.96,2723.64
LED_G: R9.1 TP6.1 U4.16 | length 1574.2
  Top Layer w15: U4.16@3013.98,3463.35 3106.65,3463.35 ; U4.16@3054.1,3454.73 cw(c3074.9,3433.93) 3074.9,3463.35 cw(c3074.9,3492.76) U4.16@3054.1,3471.96 ; U4.16@3057.32,3463.35 cw(c3057.32,3361.32) 3129.46,3433.46 cw(c3087.13,3391.13) 3147,3391.13 ; 3092.8,3463.35 ccw(c3092.8,3515.2) TP6.1@3129.46,3478.54 ; 3093.54,3463.35 cw(c3093.54,3397.54) TP6.1@3140.07,3444.07 ; TP6.1@3120.46,3451.4 ccw(c3106.66,3449.39) 3106.66,3463.35 ; TP6.1@3125.33,3473.45 cw(c3106.66,3485.66) 3106.66,3463.35 ; 3147,3321 3147,3423 3106.65,3463.35 ; 3147,3366.99 cw(c3241.01,3366.99) TP6.1@3174.54,3433.46 ; 3147,3403.2 cw(c3204.8,3403.2) TP6.1@3163.93,3444.07 ; 3147.77,3321 3147.77,3290.23 3235.44,3202.56 3268.44,3202.56 3311,3160 3311,2757 ; R9.1@3227.31,2644 3280,2644 3311,2675 3311,2757 ; R9.1@3234.96,2636.36 cw(c3253.4,2617.91) 3253.4,2644 cw(c3253.4,2670.09) R9.1@3234.96,2651.64 ; 3311,2732 3311,2757
LED_R: R8.1 U4.7 | length 412
  Top Layer w15: R8.1@2321.36,3210.96 ccw(c2302.91,3229.4) 2329,3229.4 ccw(c2355.09,3229.4) R8.1@2336.64,3210.96 ; 2327,3277 2315,3289 ; R8.1@2329,3198.31 2329,3275 2315,3289 ; U4.7@2349.89,3399.68 ccw(c2329.09,3378.87) 2329.09,3408.29 ccw(c2329.09,3437.71) U4.7@2349.89,3416.91 ; U4.7@2390,3408.29 2311.29,3408.29 2297,3394 2297,3307 2315,3289
M1_INA: R14.2 U1.2 | length 182.7
  Top Layer w10: U1.2@2153.5,2515 2221.68,2515 R14.2@2248.68,2488 ; U1.2@2170.13,2510.18 cw(c2181.75,2498.56) 2181.75,2515 cw(c2181.75,2531.44) U1.2@2170.13,2519.82 ; 2224.29,2512.4 ccw(c2248.68,2536.79) R14.2@2248.68,2502.29 ; 2226.66,2510.02 cw(c2205.63,2488.98) R14.2@2235.38,2488.98
M1_INB: R15.2 U1.3 | length 199.2
  Top Layer w10: U1.3@2153.5,2565 R15.2@2239.68,2565 ; U1.3@2170.13,2560.18 cw(c2181.75,2548.56) 2181.75,2565 cw(c2181.75,2581.44) U1.3@2170.13,2569.82 ; 2197.21,2565 cw(c2197.21,2505.51) R15.2@2239.27,2547.57 ; 2221.35,2565 cw(c2221.35,2529.65) R15.2@2246.35,2554.65
  Top Layer w15: R15.2@2239.68,2565 R15.2@2248.68,2556
M2_INA: R17.2 U3.2 | length 205.9
  Top Layer w10: U3.2@2150.5,2852 2213,2852 2229,2836 2270.68,2836 R17.2@2272.68,2834 ; U3.2@2167.13,2847.18 cw(c2178.75,2835.56) 2178.75,2852 cw(c2178.75,2868.44) U3.2@2167.13,2856.82 ; 2229.11,2836 cw(c2229.11,2800.41) R17.2@2254.27,2825.57 ; 2234.01,2836 ccw(c2234.01,2864.66) R17.2@2254.27,2844.39
M2_INB: R16.2 U3.3 | length 199.9
  Top Layer w10: U3.3@2150.5,2902 R16.2@2272.68,2902 ; U3.3@2167.13,2897.18 cw(c2178.75,2885.56) 2178.75,2902 cw(c2178.75,2918.44) U3.3@2167.13,2906.82 ; R16.2@2253.27,2892.59 ccw(c2230.56,2869.87) 2230.56,2902 ccw(c2230.56,2934.13) R16.2@2253.27,2911.41
  Top Layer w15: R16.2@2272.68,2902 R16.2@2273.68,2903